# Altium PCB PCB-CAPE-Nucleo_Interface_V1R0.PcbDoc (part 2 of 2)
Units mm, origin at the board's own origin, x right, y up, seen from the top; angles counter-clockwise.
Board outline 100 x 100 mm, 4 copper layers (Top Layer, Layer 1, Layer 2, Bottom Layer), stack 1.494 mm thick; 130 components, 101 nets, 458 pads, 87 vias.
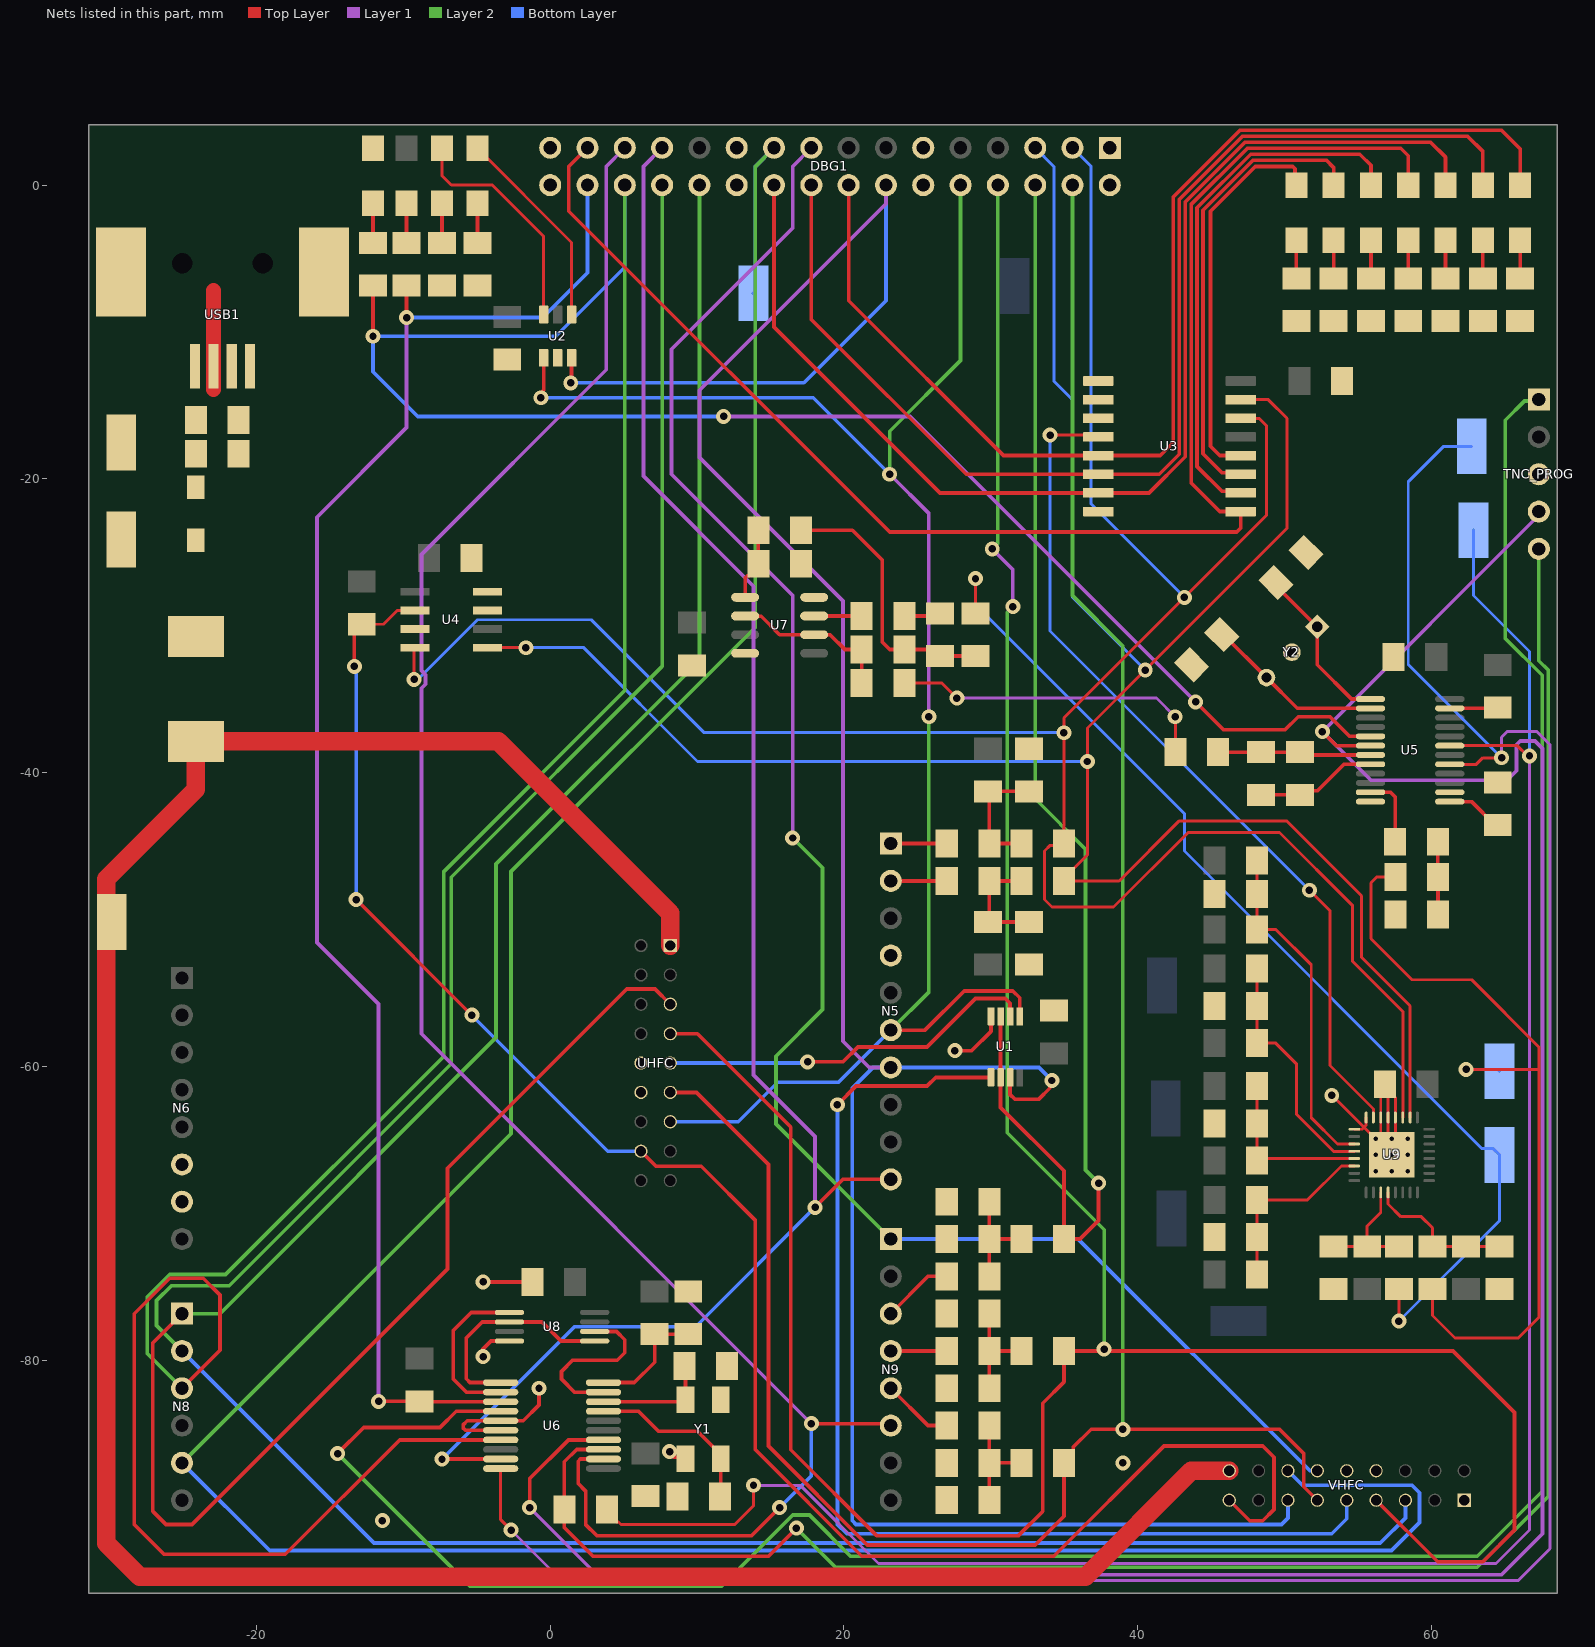
[diagram p4: the nets of this part, all layers, seen from the top]

## Via types
v1: diameter 1.016, hole 0.508, Top Layer to Bottom Layer, tented both sides, 78 vias
v2: diameter 0.61, hole 0.305, Top Layer to Bottom Layer, 9 vias

## Nets (pads, with @x,y where several pads share a name; then routed paths per layer and width w, separated by ;. In a path a pad name is that pad's centre, name@x,y a point inside that pad or via, vN(x,y) a via of type N, cw(c..) or ccw(c..) an arc to the next point about the centre after c; other vN are vias at no path point) (continued)
COM_VHF_TOP/B\O\T\: DBG1.17 N9.1 VHFC.12 | length 122.6
  Layer 1 w0.254: v1(16.51,-44.45) 16.51,-27.94 8.255,-19.685 8.255,-11.176 16.51,-2.921 16.51,1.27 DBG1.17@17.78,2.54
  Layer 2 w0.254: v1(16.51,-44.45) 18.542,-46.482 18.542,-56.134 15.367,-59.309 15.367,-63.932 N9.1@23.19,-71.755
  Bottom Layer w0.254: N9.1@23.19,-71.755 35.941,-71.755 51.721,-87.535 VHFC.12@52.23,-87.535
COM_VHF_TX/R\X\: DBG1.19 N8.5 VHF_TRANS.1 VHFC.14 | length 215.8
  Layer 2 w0.254: N8.5@-25.07,-86.995 -2.667,-64.592 -2.667,-46.736 13.97,-30.099 13.97,1.27 DBG1.19@15.24,2.54
  Bottom Layer w0.254: N8.5@-25.07,-86.995 -19.101,-92.964 57.277,-92.964 59.182,-91.059 59.182,-89.027 58.674,-88.519 51.214,-88.519 VHFC.14@50.23,-87.535 ; VHF_TRANS.1@13.843,-7.366 13.97,-7.239 13.97,1.27 DBG1.19@15.24,2.54
DEBUG_LED_4: DBG1.29 DS4.1 U3.9 | length 102.6
  Top Layer w0.254: DBG1.29@2.54,2.54 1.27,1.27 1.27,-1.778 23.114,-23.622 46.736,-23.622 47.014,-23.344 U3.9@47.014,-22.225 45.593,-22.225 43.637,-20.269 43.637,-1.321 47.473,2.515 57.912,2.515 58.42,2.007 DS4.1@58.42,0
DEBUG_LED_5: DS5.1 U3.10 | length 36.3
  Top Layer w0.254: U3.10@47.014,-20.955 46.909,-20.85 45.742,-20.85 44.044,-19.152 44.044,-1.543 47.695,2.108 55.118,2.108 55.88,1.346 DS5.1@55.88,0
DEBUG_LED_6: DS6.1 U3.11 | length 31.4
  Top Layer w0.254: U3.11@47.014,-19.685 46.909,-19.58 45.742,-19.58 44.45,-18.288 44.45,-1.711 47.863,1.702 52.832,1.702 53.34,1.194 DS6.1@53.34,0
DEBUG_LED_7: DS7.1 U3.12 | length 26.5
  Top Layer w0.254: U3.12@47.014,-18.415 45.593,-18.415 44.958,-17.78 44.958,-1.778 48.006,1.27 50.546,1.27 50.709,1.107 50.709,0.091 DS7.1@50.8,0
GND: C1.2 C2.1 C3.1 C4.1 C5.1 C6.1 C7.2 C8.2 C9.2 C13.2 C16.1 C17.2 C19.1 C20.1 C21.1 C22.1 C23.1 C24.1 C25.1 C28.1 C29.1 C33.2 DBG1.1 DBG1.2 DBG1.11 DBG1.12 DBG1.21 DBG1.22 DBG1.31 DBG1.32 N5.4 N6.6 N6.7 R13.1 R14.1 R15.1 R16.2 R17.2 R18.2 R19.2 R20.2 R21.2 R23.2 R24.2 R25.2 R30.2 R39.1 R46.1 R47.1 R48.1 R49.1 R50.1 R51.1 TNC_PROG.3 TNC_PTT.2 U1.4 U2.2 U3.1 U3.2 U3.3 U3.8 U4.3 U4.7 U4.8 U5.12 U5.14 U6.5 U6.6 U7.4 U7.8 U8.4 U9.1 U9.28 U9.29 U9.30 U9.32 U9.33 UHFC.10 UHFC.12 USB1.4 USB1.5 USB1.6 VHFC.1 VHFC.8 VHFC.10 Y1.2 Y1.4 Y2.2 | length 48.3
  Top Layer w0.203: v1(53.213,-61.976) 53.243,-61.976 55.411,-64.144 ; U9.1@54.747,-64.28 55.275,-64.28 55.411,-64.144 ; U9.32@55.547,-63.48 55.547,-64.008 55.411,-64.144 ; v2(56.197,-64.93) 55.411,-64.144 ; C33.2@56.945,-61.316 57.047,-61.418 C33.2@57.047,-61.618 ; C33.2@56.945,-61.316 C33.2@56.843,-61.214 56.547,-61.51 U9.30@56.547,-63.48 56.547,-65.28 U9.33@57.047,-65.78 ; C33.2@56.945,-61.316 56.945,-61.516 C33.2@57.047,-61.618 ; U9.33@57.047,-65.78 U9.29@57.047,-63.48 C33.2@57.047,-61.618 ; U9.33@57.047,-65.78 v2(57.297,-66.03) 57.547,-65.78 U9.28@57.547,-63.48 57.547,-62.118 C33.2@57.047,-61.618
  Top Layer w0.254: v1(-4.572,-79.756) -4.572,-79.248 -4.023,-78.699 U8.4@-2.773,-78.699 ; v1(-4.572,-74.676) C21.1@-1.196,-74.676 ; U6.6@-3.373,-84.78 -5.771,-84.78 -5.927,-84.624 -5.927,-84.413 -5.644,-84.13 U6.5@-3.373,-84.13 -1.834,-84.13 -0.762,-83.058 v1(-0.762,-81.915) ; v1(8.128,-86.233) 8.128,-86.36 8.382,-86.614 9.119,-86.614 Y1.4@9.214,-86.709 ; v1(27.559,-58.928) 28.702,-58.928 30.013,-57.617 U1.4@30.013,-56.599
  Top Layer w1.016: -22.928,-13.911 USB1.4@-22.928,-12.334 -22.928,-7.18
  other v1: -11.43,-90.932 38.989,-86.995
  other v2: 56.197,-67.13 57.297,-67.13 58.397,-67.13 56.197,-66.03 58.397,-66.03 57.297,-64.93 58.397,-64.93
I2C1_SCL_OUT: DBG1.3 R4.2 U3.14 U4.4 U9.27 | length 167.2
  Top Layer w0.203: v1(-9.271,-33.655) -9.271,-31.571 U4.4@-9.196,-31.496 ; U3.14@47.014,-15.875 48.26,-15.875 48.768,-16.383 48.768,-22.479 v1(43.18,-28.067) 34.98,-36.267 v1(34.98,-37.283) R4.2@34.98,-44.831 34.861,-44.95 34.044,-44.95 33.655,-45.339 33.655,-48.641 34.163,-49.149 38.354,-49.149 43.434,-44.069 49.657,-44.069 54.61,-49.022 54.61,-52.832 58.047,-56.269 U9.27@58.047,-63.48
  Bottom Layer w0.203: v1(-9.271,-33.655) -9.017,-33.655 -4.953,-29.591 2.794,-29.591 10.486,-37.283 v1(34.98,-37.283) ; DBG1.3@35.56,2.54 36.83,1.27 36.83,-21.717 v1(43.18,-28.067)
I2C1_SCL_ST: N5.1 R3.1 | length 3.8
  Top Layer w0.254: N5.1@23.19,-44.831 R3.1@27,-44.831
I2C1_SDA_OUT: DBG1.5 R6.2 U3.15 U4.5 U9.26 | length 164.7
  Top Layer w0.203: U4.5@-4.266,-31.496 v1(-1.651,-31.496) ; U3.15@47.014,-14.605 48.895,-14.605 50.165,-15.875 50.165,-23.368 v1(40.513,-33.02) 36.576,-36.957 v1(36.576,-39.243) 36.576,-45.593 35.646,-46.523 35.628,-46.523 34.98,-47.171 R6.2@34.98,-47.371 38.735,-47.371 42.799,-43.307 50.165,-43.307 55.245,-48.387 55.245,-52.578 58.547,-55.88 U9.26@58.547,-63.48
  Bottom Layer w0.203: v1(-1.651,-31.496) 2.286,-31.496 10.033,-39.243 v1(36.576,-39.243) ; DBG1.5@33.02,2.54 34.29,1.27 34.29,-13.335 35.56,-14.605 35.56,-28.067 v1(40.513,-33.02)
I2C1_SDA_ST: N5.2 R5.1 | length 3.8
  Top Layer w0.254: N5.2@23.19,-47.371 R5.1@27,-47.371
M_OSC1: C24.2 U5.1 Y2.1 | length 11.4
  Top Layer w0.254: C24.2@49.403,-27.051 49.403,-27.262 Y2.1@52.219,-30.077 52.219,-32.661 54.546,-34.989 U5.1@55.847,-34.989
M_OSC2: C25.2 U5.2 Y2.3 | length 12.2
  Top Layer w0.254: C25.2@45.72,-30.607 45.847,-30.607 Y2.3@48.768,-33.528 50.863,-35.623 U5.2@55.847,-35.623
MUX_RST: U3.4 U9.31 | length 58.9
  Top Layer w0.203: v1(34.036,-17.018) 37.187,-17.018 U3.4@37.314,-17.145 ; v1(51.689,-48.006) 53.086,-49.403 53.086,-59.944 56.047,-62.905 U9.31@56.047,-63.48
  Bottom Layer w0.203: v1(34.036,-17.018) 34.036,-30.353 v1(51.689,-48.006)
MUX_X0: C26.1 R40.1 R46.2 U9.3 | length 23.5
  Top Layer w0.203: R40.1@48.133,-45.974 R46.2@48.133,-48.26 C26.1@48.133,-50.673 49.403,-50.673 51.816,-53.086 51.816,-63.5 53.596,-65.28 U9.3@54.747,-65.28
MUX_X1: C27.1 R41.1 R47.2 U9.4 | length 16.8
  Top Layer w0.203: C27.1@48.133,-53.34 R47.2@48.133,-55.88 R41.1@48.133,-58.42 49.403,-58.42 50.8,-59.817 50.8,-63.246 53.334,-65.78 U9.4@54.747,-65.78
MUX_X2: C30.1 R42.1 R48.2 U9.5 | length 11.8
  Top Layer w0.203: R42.1@48.133,-61.341 R48.2@48.133,-63.881 C30.1@48.133,-66.421 48.274,-66.28 U9.5@54.747,-66.28
MUX_X3: C31.1 R43.1 R49.2 U9.6 | length 12.7
  Top Layer w0.203: C31.1@48.133,-74.168 R49.2@48.133,-71.628 R43.1@48.133,-69.088 51.562,-69.088 53.87,-66.78 U9.6@54.747,-66.78
MUX_Y2: C34.1 R45.1 R51.2 U9.11 | length 8.5
  Top Layer w0.203: R51.2@53.34,-72.263 R45.1@55.626,-72.263 ; U9.11@56.547,-68.58 56.547,-69.945 55.626,-70.866 R45.1@55.626,-72.263 ; C34.1@57.785,-72.263 R45.1@55.626,-72.263
MUX_Y3: C32.1 R44.1 R50.2 U9.12 | length 10.3
  Top Layer w0.203: U9.12@57.047,-68.58 57.047,-69.366 57.912,-70.231 59.309,-70.231 60.071,-70.993 C32.1@60.071,-72.263 R44.1@62.357,-72.263 R50.2@64.643,-72.263
NetC2_2: C2.2 R2.1 R3.2 R4.1 | length 8.6
  Top Layer w0.254: R4.1@32.08,-44.831 R3.2@29.9,-44.831 29.9,-41.381 R2.1@29.794,-41.275 C2.2@32.588,-41.275
NetC3_2: C3.2 R1.1 R5.2 R6.1 | length 7.8
  Top Layer w0.254: R6.1@32.08,-47.371 R5.2@29.9,-47.371 29.9,-50.059 R1.1@29.794,-50.165 C3.2@32.588,-50.165
NetC4_2: C4.2 R7.2 R8.1 R13.2 | length 7.3
  Top Layer w0.254: R13.2@29.9,-89.535 C4.2@29.9,-86.995 ; R7.2@29.9,-84.455 C4.2@29.9,-86.995 ; R8.1@32.08,-86.995 C4.2@29.9,-86.995
NetC5_2: C5.2 R9.2 R10.1 R14.2 | length 7.3
  Top Layer w0.254: C5.2@29.9,-81.915 R9.2@29.9,-79.375 ; R14.2@29.9,-76.835 R9.2@29.9,-79.375 ; R10.1@32.08,-79.375 R9.2@29.9,-79.375
NetC6_2: C6.2 R11.2 R12.1 R15.2 | length 7.3
  Top Layer w0.254: R11.2@29.9,-74.295 C6.2@29.9,-71.755 ; R15.2@29.9,-69.215 C6.2@29.9,-71.755 ; R12.1@32.08,-71.755 C6.2@29.9,-71.755
NetC10_1: C10.1 R32.2 | length 21.8
  Top Layer w0.203: C10.1@24.109,-33.909 26.67,-33.909 v1(27.686,-34.925) ; v1(42.545,-36.195) 42.566,-36.216 R32.2@42.566,-38.608
  Layer 1 w0.203: v1(27.686,-34.925) 41.275,-34.925 v1(42.545,-36.195)
NetC10_2: C10.2 C11.1 U7.2 U7.6 | length 11.2
  Top Layer w0.254: U7.6@13.271,-29.337 13.284,-29.35 14.364,-29.35 15.621,-30.607 U7.2@17.971,-30.607 17.984,-30.62 19.063,-30.62 20.066,-31.623 C11.1@21.209,-31.623 C10.2@21.209,-33.909
NetC11_2: C11.2 C14.1 R35.1 R38.2 | length 18.7
  Top Layer w0.254: R38.2@17.071,-23.495 20.574,-23.495 22.606,-25.527 22.606,-31.115 23.114,-31.623 C11.2@24.109,-31.623 26.109,-31.623 R35.1@26.543,-32.057 C14.1@28.956,-32.057
NetC12_1: C12.1 R32.1 R33.1 U5.7 | length 10.7
  Top Layer w0.254: R32.1@45.466,-38.608 R33.1@48.387,-38.608 C12.1@50.8,-38.608 ; C12.1@51.054,-38.608 C12.1@50.8,-38.608 ; U5.7@55.847,-38.798 50.99,-38.798 C12.1@50.8,-38.608
NetC12_2: C12.2 R33.2 U5.8 | length 8.3
  Top Layer w0.254: R33.2@48.387,-41.508 C12.2@51.054,-41.508 51.326,-41.236 52.236,-41.236 54.038,-39.433 U5.8@55.847,-39.433
NetC13_1: C13.1 U5.13 | length 3.9
  Top Layer w0.254: U5.13@61.247,-41.974 62.729,-41.974 64.316,-43.561 C13.1@64.516,-43.561
NetC15_1: C15.1 R37.1 R39.2 | length 5
  Top Layer w0.254: R37.1@60.431,-44.704 60.431,-47.096 C15.1@60.452,-47.117 R39.2@60.452,-49.657
NetC16_2: C16.2 R38.1 U7.5 | length 5.6
  Top Layer w0.254: U7.5@13.803,-27.907 13.643,-28.067 U7.5@13.271,-28.067 13.271,-26.753 13.42,-26.604 13.548,-26.604 14.171,-25.981 C16.2@14.171,-25.781 R38.1@14.171,-23.495
NetDS4_2: DS4.2 R25.1 | length 2.6
  Top Layer w0.254: R25.1@58.42,-6.35 DS4.2@58.42,-3.75
NetDS5_2: DS5.2 R17.1 | length 2.6
  Top Layer w0.254: R17.1@55.88,-6.35 DS5.2@55.88,-3.75
NetDS6_2: DS6.2 R20.1 | length 2.6
  Top Layer w0.254: R20.1@53.34,-6.35 DS6.2@53.34,-3.75
NetDS7_2: DS7.2 R24.1 | length 2.6
  Top Layer w0.254: R24.1@50.8,-6.35 DS7.2@50.8,-3.75
NetR16_1: R16.1 UACT.2 | length 2.6
  Top Layer w0.254: R16.1@66.04,-6.35 UACT.2@66.04,-3.75
NetR18_1: R18.1 UHF.2 | length 2.7
  Top Layer w0.254: R18.1@-7.366,-3.937 UHF.2@-7.366,-1.24
NetR19_1: R19.1 VACT.2 | length 2.6
  Top Layer w0.254: R19.1@63.5,-6.35 VACT.2@63.5,-3.75
NetR21_1: R21.1 VHF.2 | length 2.7
  Top Layer w0.254: R21.1@-4.953,-3.937 VHF.2@-4.953,-1.24
NetR23_1: R23.1 TACT.2 | length 2.6
  Top Layer w0.254: R23.1@60.96,-6.35 TACT.2@60.96,-3.75
NetR26_1: R26.1 U5.23 | length 3.3
  Top Layer w0.254: U5.23@61.247,-35.623 64.453,-35.623 R26.1@64.516,-35.56
NetR27_2: R27.2 R30.1 U6.20 | length 8.3
  Top Layer w0.254: U6.20@3.627,-81.53 5.719,-81.53 7.112,-80.137 R27.2@7.112,-78.232 R30.1@9.398,-78.232
NetR28_2: R28.2 TNC_PTT.1 | length 2.7
  Top Layer w0.254: R28.2@-12.065,-3.937 TNC_PTT.1@-12.065,-1.24
NetR34_1: R34.1 TNC_EGY.2 | length 2.7
  Top Layer w0.254: R34.1@-9.779,-3.937 TNC_EGY.2@-9.779,-1.24
NetR35_2: R35.2 R36.2 | length 2.5
  Top Layer w0.254: R36.2@24.109,-29.337 26.363,-29.337 R35.2@26.543,-29.157
NetR36_1: R36.1 U7.3 | length 3.2
  Top Layer w0.254: U7.3@17.971,-29.337 R36.1@21.209,-29.337
NetR37_2: R37.2 U5.11 | length 4.9
  Top Layer w0.254: U5.11@55.847,-41.338 57.213,-41.338 57.531,-41.656 R37.2@57.531,-44.704
NetU2_4: U2.4 VHF.1 | length 14
  Top Layer w0.203: VHF.1@-4.953,2.51 1.458,-3.901 U2.4@1.458,-8.812
NetU2_6: U2.6 UHF.1 | length 15.8
  Top Layer w0.203: UHF.1@-7.366,2.51 -7.366,0.635 -6.731,0 -3.937,0 -0.442,-3.495 U2.6@-0.442,-8.812
OneWire: R22.2 U4.2 UHFC.16 VHFC.17 | length 124.1
  Top Layer w0.203: R22.2@-12.827,-29.898 -11.356,-29.898 -10.414,-28.956 U4.2@-9.196,-28.956
  Top Layer w0.254: v1(-13.335,-32.766) -13.335,-30.406 R22.2@-12.827,-29.898 ; v1(-13.208,-48.641) v1(-5.334,-56.515) ; UHFC.16@6.18,-65.772 7.21,-66.802 10.287,-66.802 13.97,-70.485 13.97,-86.106 21.209,-93.345 34.29,-93.345 41.783,-85.852 48.514,-85.852 49.276,-86.614 49.276,-90.17 48.514,-90.932 47.627,-90.932 VHFC.17@46.23,-89.535
  Bottom Layer w0.254: v1(-13.335,-32.766) -13.208,-32.893 v1(-13.208,-48.641) ; v1(-5.334,-56.515) 3.923,-65.772 UHFC.16@6.18,-65.772
PA_PWR: D1.1 PA_Power.1 UHFC.1 VHFC.18 | length 176.8
  Top Layer w1.27: UHFC.1@8.18,-51.772 8.18,-49.582 -3.531,-37.871 D1.1@-24.13,-37.871 -24.13,-41.148 -30.226,-47.244 -30.226,-92.456 -27.94,-94.742 36.449,-94.742 43.656,-87.535 VHFC.18@46.23,-87.535
SPI1_MISO_OUT: DBG1.6 R12.2 U1.3 U1.6 | length 92.1
  Top Layer w0.254: U1.3@30.663,-56.599 U1.6@30.663,-60.749 30.663,-62.794 34.98,-67.111 R12.2@34.98,-71.755 36.068,-71.755 37.338,-70.485 v1(37.338,-67.945)
  Layer 2 w0.254: DBG1.6@33.02,0 33.02,-41.783 36.449,-45.212 36.449,-67.056 v1(37.338,-67.945)
SPI1_MISO_ST: N9.3 R11.1 | length 4.9
  Top Layer w0.254: N9.3@23.19,-76.835 25.73,-74.295 R11.1@27,-74.295
SPI1_MISO_UHF: U1.2 UHFC.9 | length 26
  Top Layer w0.254: v1(17.526,-59.69) 19.939,-59.69 20.955,-58.674 25.654,-58.674 28.956,-55.372 30.988,-55.372 31.313,-55.697 U1.2@31.313,-56.599
  Bottom Layer w0.254: UHFC.9@8.18,-59.772 17.444,-59.772 v1(17.526,-59.69)
SPI1_MISO_VHF: U1.5 VHFC.9 | length 76.4
  Top Layer w0.254: v1(19.558,-62.611) 20.828,-61.341 25.654,-61.341 26.246,-60.749 U1.5@30.013,-60.749
  Bottom Layer w0.254: v1(19.558,-62.611) 19.558,-91.186 20.192,-91.82 53.214,-91.82 54.23,-90.804 VHFC.9@54.23,-89.535
SPI1_MOSI_OUT: DBG1.8 R10.2 UHFC.7 VHFC.7 | length 200.1
  Top Layer w0.254: UHFC.7@8.18,-57.772 10.02,-57.772 16.383,-64.135 16.383,-86.106 22.225,-91.948 31.877,-91.948 33.528,-90.297 33.528,-82.931 34.98,-81.479 R10.2@34.98,-79.375 v1@37.719,-79.375 ; v1(37.719,-79.248) v1@37.719,-79.375 ; VHFC.7@56.23,-89.535 60.421,-93.726 63.5,-93.726 65.659,-91.567 65.659,-83.566 61.468,-79.375 v1@37.719,-79.375
  Layer 1 w0.254: v1(30.099,-24.765) 31.496,-26.162 v1(31.496,-28.702)
  Layer 2 w0.254: v1(30.099,-24.765) 30.48,-24.384 DBG1.8@30.48,0 ; v1(31.496,-28.702) 31.115,-29.083 31.115,-64.516 37.719,-71.12 v1(37.719,-79.248)
SPI1_MOSI_ST: N9.4 R9.1 | length 3.8
  Top Layer w0.254: N9.4@23.19,-79.375 R9.1@27,-79.375
SPI1_SCK_OUT: DBG1.4 R8.2 UHFC.11 VHFC.11 | length 163.1
  Top Layer w0.254: UHFC.11@8.18,-61.772 9.956,-61.772 14.859,-66.675 14.859,-85.852 21.59,-92.583 33.02,-92.583 34.98,-90.623 R8.2@34.98,-86.995 34.98,-86.795 35.603,-86.172 35.603,-85.936 36.83,-84.709 v1(38.989,-84.709) 49.657,-84.709 51.308,-86.36 51.308,-88.613 VHFC.11@52.23,-89.535
  Layer 2 w0.254: DBG1.4@35.56,0 35.56,-27.94 38.989,-31.369 v1(38.989,-84.709)
SPI1_SCK_ST: N9.5 R7.1 | length 4.9
  Top Layer w0.254: N9.5@23.19,-81.915 25.73,-84.455 R7.1@27,-84.455
TNC_ACTIVE: DBG1.20 TACT.1 U3.7 | length 82.4
  Top Layer w0.254: DBG1.20@15.24,0 15.24,-9.652 26.543,-20.955 U3.7@37.314,-20.955 40.767,-20.955 43.231,-18.491 43.231,-1.152 47.304,2.921 59.944,2.921 60.96,1.905 TACT.1@60.96,0
TNC_CS: U6.2 U8.1 | length 11.2
  Top Layer w0.254: U6.2@-3.373,-82.18 -5.704,-82.18 -6.604,-81.28 -6.604,-77.978 -5.375,-76.749 U8.1@-2.773,-76.749
TNC_ENERGY: DBG1.30 R29.2 R34.2 U6.3 | length 108.1
  Top Layer w0.254: v1(-11.684,-82.804) R29.2@-8.89,-82.804 -8.864,-82.83 U6.3@-3.373,-82.83 ; v1(-9.779,-9.017) R34.2@-9.779,-6.837
  Layer 1 w0.254: v1(-11.684,-82.804) -11.684,-55.753 -15.875,-51.562 -15.875,-22.606 -9.779,-16.51 v1(-9.779,-9.017)
  Bottom Layer w0.254: v1(-9.779,-9.017) -0.508,-9.017 2.54,-5.969 DBG1.30@2.54,0
TNC_M\C\L\R\: TNC_PROG.1 U6.4 | length 179.9
  Top Layer w0.254: v1(-14.478,-86.36) -12.7,-84.582 -7.493,-84.582 -6.391,-83.48 U6.4@-3.373,-83.48
  Layer 2 w0.254: v1(-14.478,-86.36) -5.461,-95.377 11.684,-95.377 16.51,-90.551 17.653,-90.551 20.447,-93.345 63.119,-93.345 67.539,-88.925 67.539,-33.376 65.024,-30.861 65.024,-16.002 66.328,-14.698 67.217,-14.698 TNC_PROG.1@67.31,-14.605
TNC_MRX: R31.2 TNC_FSK_RX.1 U5.19 | length 143.8
  Top Layer w0.203: R31.2@3.863,-90.17 3.863,-90.37 4.511,-91.018 4.658,-91.018 4.826,-91.186 12.573,-91.186 13.843,-89.916 v1(13.843,-88.519) ; U5.19@61.247,-38.163 65.849,-38.163 66.548,-38.862 v1(66.675,-38.862)
  Layer 1 w0.203: v1(13.843,-88.519) 17.018,-88.519 22.352,-93.853 64.389,-93.853 66.675,-91.567 v1(66.675,-38.862)
  Bottom Layer w0.203: TNC_FSK_RX.1@62.865,-23.495 62.865,-27.94 66.675,-31.75 v1(66.675,-38.862)
TNC_MTX: TNC_FSK_TX.1 U5.17 U6.10 | length 167.9
  Top Layer w0.203: U6.10@-3.373,-87.38 -3.373,-90.861 v1(-2.667,-91.567) ; U5.17@61.247,-39.433 63.055,-39.433 63.5,-38.989 v1(64.77,-38.989)
  Layer 1 w0.203: v1(-2.667,-91.567) 0.762,-94.996 65.913,-94.996 68.072,-92.837 68.072,-38.1 67.183,-37.211 65.151,-37.211 64.77,-37.592 v1(64.77,-38.989)
  Bottom Layer w0.203: TNC_FSK_TX.1@62.738,-17.78 60.833,-17.78 58.42,-20.193 58.42,-32.639 v1(64.77,-38.989)
TNC_OSC1: C22.2 U6.17 Y1.1 | length 12.1
  Top Layer w0.254: U6.17@3.627,-83.48 6.01,-83.48 7.366,-84.836 10.033,-84.836 11.614,-86.417 Y1.1@11.614,-86.709 11.614,-89.224 C22.2@11.557,-89.281
TNC_OSC2: C23.2 U6.18 Y1.3 | length 8
  Top Layer w0.254: U6.18@3.627,-82.83 9.093,-82.83 Y1.3@9.214,-82.709 9.214,-80.461 C23.2@9.144,-80.391
TNC_PGC: R31.1 TNC_PROG.5 U6.13 | length 143.9
  Top Layer w0.254: U6.13@3.627,-86.08 1.804,-86.08 0.963,-86.921 R31.1@0.963,-90.17 0.963,-91.387 2.921,-93.345 14.859,-93.345 v1(16.764,-91.44)
  Layer 2 w0.254: v1(16.764,-91.44) 19.431,-94.107 63.119,-94.107 67.945,-89.281 67.945,-33.02 67.31,-32.385 TNC_PROG.5@67.31,-24.765
TNC_PGD: TNC_PROG.4 U5.6 U6.14 | length 177
  Top Layer w0.254: v1(-1.397,-90.043) -1.397,-88.064 1.237,-85.43 U6.14@3.627,-85.43 ; v1(52.578,-37.211) 53.53,-38.163 U5.6@55.847,-38.163
  Layer 1 w0.254: v1(-1.397,-90.043) 3.175,-94.615 64.77,-94.615 67.564,-91.821 67.564,-38.354 67.056,-37.846 66.04,-37.846 65.786,-38.1 65.786,-39.878 65.151,-40.513 55.88,-40.513 v1(52.578,-37.211) 67.31,-22.479 TNC_PROG.4@67.31,-22.225
TNC_PTT_IRQ: DBG1.28 N8.3 R28.1 U5.5 U6.7 | length 266.2
  Top Layer w0.254: N8.3@-25.07,-81.915 -22.479,-79.324 -22.479,-75.565 -23.622,-74.422 -25.908,-74.422 -28.321,-76.835 -28.321,-91.186 -26.289,-93.218 -18.034,-93.218 -10.246,-85.43 U6.7@-3.373,-85.43 ; v1(-12.065,-10.287) R28.1@-12.065,-6.837 ; v1(43.942,-35.179) 45.847,-37.084 50.038,-37.084 50.927,-36.195 53.086,-36.195 54.419,-37.529 U5.5@55.847,-37.529
  Layer 1 w0.254: v1(11.811,-15.748) 24.511,-15.748 v1(43.942,-35.179)
  Layer 2 w0.254: N8.3@-25.07,-81.915 -27.432,-79.553 -27.432,-75.692 -25.908,-74.168 -22.098,-74.168 -7.239,-59.309 -7.239,-46.736 5.08,-34.417 DBG1.28@5.08,0
  Bottom Layer w0.254: DBG1.28@5.08,0 5.08,-5.588 0.381,-10.287 v1(-12.065,-10.287) -12.065,-12.7 -9.017,-15.748 v1(11.811,-15.748)
TNC_SCK: U6.19 U8.6 | length 11.8
  Top Layer w0.254: U8.6@3.027,-78.049 4.516,-78.049 5.08,-78.613 5.08,-79.502 4.572,-80.01 1.524,-80.01 0.762,-80.772 0.762,-81.28 1.662,-82.18 U6.19@3.627,-82.18
TNC_SIG_IN: C14.2 C34.2 TNCo.1 | length 73.2
  Top Layer w0.203: C14.2@28.956,-29.157 v1(28.956,-26.797) ; v1(57.785,-77.343) C34.2@57.785,-75.163
  Bottom Layer w0.203: v1(28.956,-26.797) 28.956,-28.575 43.18,-42.799 43.18,-45.339 63.442,-65.601 64.204,-65.601 TNCo.1@64.643,-66.04 64.643,-70.485 v1(57.785,-77.343)
TNC_SIG_OUT: C15.2 C32.2 TNCi.1 | length 56.1
  Top Layer w0.203: C15.2@57.552,-47.117 56.261,-47.117 55.88,-47.498 55.88,-51.308 58.674,-54.102 62.738,-54.102 67.31,-58.674 67.31,-60.198 ; C32.2@60.071,-75.163 60.071,-76.962 61.595,-78.486 65.913,-78.486 67.31,-77.089 67.31,-60.198 ; v1(62.357,-60.198) 67.31,-60.198
  Bottom Layer w0.203: v1(62.357,-60.198) 64.516,-60.198 TNCi.1@64.643,-60.325
TNC_SPI: U6.1 U8.2 U8.5 | length 15
  Top Layer w0.254: U6.1@-3.373,-81.53 -5.454,-81.53 -5.715,-81.269 -5.715,-78.486 -4.628,-77.399 U8.2@-2.773,-77.399 -0.564,-77.399 0.736,-78.699 U8.5@3.027,-78.699
U1_ST_RX-TNC_TX: DBG1.27 N9.6 U6.12 | length 136.5
  Top Layer w0.254: U6.12@3.627,-86.73 2.054,-86.73 1.905,-86.879 1.905,-88.392 2.413,-88.9 2.413,-91.186 3.175,-91.948 13.716,-91.948 v1(15.621,-90.043) ; v1(17.78,-84.328) 23.063,-84.328 N9.6@23.19,-84.455
  Layer 1 w0.254: DBG1.27@5.08,2.54 3.81,1.27 3.81,-12.573 -8.763,-25.146 -8.763,-33.049 -8.484,-33.329 -8.484,-33.981 -8.763,-34.261 -8.763,-57.785 v1(17.78,-84.328)
  Bottom Layer w0.254: v1(15.621,-90.043) 17.78,-87.884 v1(17.78,-84.328)
U1_ST_TX-TNC_RX: DBG1.25 N5.10 U6.9 | length 119.9
  Top Layer w0.254: v1(-7.366,-86.741) -7.355,-86.73 U6.9@-3.373,-86.73 ; v1(18.034,-69.596) 19.939,-67.691 N5.10@23.19,-67.691
  Layer 1 w0.254: DBG1.25@7.62,2.54 6.35,1.27 6.35,-19.812 13.843,-27.305 13.843,-60.579 18.034,-64.77 v1(18.034,-69.596)
  Bottom Layer w0.254: v1(-7.366,-86.741) 1.651,-77.724 9.906,-77.724 v1(18.034,-69.596)
UHF_ACTIVE: DBG1.16 U3.5 UACT.1 | length 79.9
  Top Layer w0.254: DBG1.16@20.32,0 20.32,-7.874 30.861,-18.415 U3.5@37.314,-18.415 41.529,-18.415 42.418,-17.526 42.418,-0.816 46.968,3.734 64.77,3.734 66.04,2.464 UACT.1@66.04,0
UHF_CS: DBG1.10 N5.6 U1.1 U2.1 UHFC.13 | length 119.3
  Top Layer w0.254: v1(-0.635,-14.478) -0.489,-14.332 -0.489,-13.995 -0.442,-13.948 U2.1@-0.442,-11.762 ; N5.6@23.19,-57.531 25.527,-57.531 28.194,-54.864 31.496,-54.864 31.963,-55.331 U1.1@31.963,-56.599
  Layer 1 w0.254: v1(23.114,-19.685) 25.781,-22.352 v1(25.781,-36.195)
  Layer 2 w0.254: v1(23.114,-19.685) 23.114,-16.764 27.94,-11.938 DBG1.10@27.94,0 ; N5.6@23.19,-57.531 25.781,-54.94 v1(25.781,-36.195)
  Bottom Layer w0.254: v1(-0.635,-14.478) 17.907,-14.478 v1(23.114,-19.685) ; UHFC.13@8.18,-63.772 12.809,-63.772 15.494,-61.087 19.634,-61.087 N5.6@23.19,-57.531
UHF_IRQ: DBG1.24 N8.1 UHFC.5 | length 162.4
  Top Layer w0.254: N8.1@-25.07,-76.835 -27.051,-78.816 -27.051,-90.297 -26.162,-91.186 -24.384,-91.186 -6.985,-73.787 -6.985,-66.929 5.207,-54.737 7.145,-54.737 UHFC.5@8.18,-55.772
  Layer 2 w0.254: N8.1@-25.07,-76.835 -22.479,-76.835 -3.683,-58.039 -3.683,-46.228 10.16,-32.385 DBG1.24@10.16,0
USB_D_N: USB1.2
USB_D_P: USB1.3
USB_Vbus: C28.2 C29.2 FB1.1 USB1.1 Vbus.1 | length 0.1
  Top Layer w0.711: C29.2@-24.178,-15.954 C29.2@-24.13,-16.002
Vbus_Filtered: D1.2 FB1.2 Vbus_f.1
VHF_ACTIVE: DBG1.18 U3.6 VACT.1 | length 81.6
  Top Layer w0.254: DBG1.18@17.78,0 17.78,-9.144 28.321,-19.685 U3.6@37.314,-19.685 41.462,-19.685 42.824,-18.323 42.824,-0.984 47.136,3.328 62.458,3.328 63.5,2.286 VACT.1@63.5,0
VHF_CS: DBG1.14 N5.7 U1.7 U2.3 VHFC.13 | length 185
  Top Layer w0.254: v1(1.397,-13.462) 1.458,-13.401 U2.3@1.458,-11.762 ; U1.7@31.313,-60.749 31.313,-61.92 31.623,-62.23 33.274,-62.23 34.017,-61.487 34.017,-61.106 v1(34.163,-60.96)
  Layer 1 w0.254: DBG1.14@22.86,0 22.86,-1.27 10.16,-13.97 10.16,-18.542 19.939,-28.321 19.939,-58.293 21.717,-60.071 N5.7@23.19,-60.071
  Bottom Layer w0.254: v1(1.397,-13.462) 17.272,-13.462 22.86,-7.874 DBG1.14@22.86,0 ; v1(34.163,-60.96) 33.274,-60.071 N5.7@23.19,-60.071 21.971,-60.071 20.574,-61.468 20.574,-90.932 20.828,-91.186 49.784,-91.186 50.23,-90.74 VHFC.13@50.23,-89.535
VHF_IRQ: DBG1.26 N8.2 VHFC.5 | length 187.3
  Layer 2 w0.254: N8.2@-25.07,-79.375 -26.797,-77.648 -26.797,-75.946 -25.781,-74.93 -21.844,-74.93 -6.731,-59.817 -6.731,-47.117 7.62,-32.766 DBG1.26@7.62,0
  Bottom Layer w0.254: N8.2@-25.07,-79.375 -11.989,-92.456 56.515,-92.456 58.23,-90.741 VHFC.5@58.23,-89.535
pads on no net: N5.5 N6.1 N6.2 N6.3 N6.8 N9.7 N9.8 U3.13 U4.6 U5.3 U5.4 U5.9 U5.10 U5.15 U5.16 U5.20 U5.21 U5.22 U6.8 U6.11 U7.1 U8.3 U9.2 U9.7 U9.8 U9.9 U9.10 U9.13 U9.14 U9.15 U9.16 U9.17 U9.18 U9.19 U9.20 U9.21 U9.22 U9.23 USB1.MH

## Polygon pours and split planes (outlines as drawn)
GND on Top Layer "GND_L01_P004" (solid, remove dead copper, pour order 4): -31.42,-95.885 68.58,-95.885 68.58,4.115 -31.42,4.115
Vbus_Filtered on Top Layer "VBUS_FILTERED_L01_P002" (solid, remove dead copper, pour order 2): -30.988,-22.352 -30.988,-34.29 -20.32,-34.29 -20.32,-22.352
USB_Vbus on Top Layer "USB_VBUS_L01_P000" (solid, remove dead copper, pour order 0): -23.622,-10.414 -30.988,-10.414 -30.988,-21.336 -22.86,-21.336 -22.86,-14.732 -23.622,-14.732
GND on Bottom Layer "GND_L04_P006" (solid, remove dead copper, pour order 6): -31.42,-95.885 68.58,-95.885 68.58,4.115 -31.42,4.115
3V3 on Layer 1 "3V3_L02_P008" (solid, remove dead copper, pour order 8): -31.42,-95.885 68.58,-95.885 68.58,4.115 -31.42,4.115
3V3 on Layer 2 "3V3_L03_P010" (solid, remove dead copper, pour order 10): -31.42,-95.885 68.58,-95.885 68.58,4.115 -31.42,4.115

## Other copper
Bottom Layer:
  text "NJE '19" at 67.056,0.635 h3.81

## Silkscreen, mask and mechanical layers (free items; w line width, h text height)
Top Overlay:
  text "V" at 64.516,4.191 h2 r180
  text "U" at 67.183,4.191 h2 r180
  text "7" at 51.562,4.064 h2 r180
  text "5" at 56.896,4.064 h2 r180
  text "4" at 59.436,4.064 h2 r180
  text "T" at 61.976,4.064 h2 r180
  text "6" at 54.356,3.937 h2 r180
  text "M / 3 / 0 / D / C" at 63.754,-27.813 h1.75
  text "CAPE-3 AX5043 Radio Board" at 3.556,-69.342 h1.52 r90
Bottom Overlay:
  text "Designed for the / Cajun Advanced Picosatellite Experiment / at UL Lafayette" at 42.799,-20.828 h1.52
  text "STM32Nucleo-L476" at 12.446,-46.101 h1.52
  text "SCH-CAPE-Nucleo_Interface_V1R0.SchDoc / '.Pcb_File_Name_No_Path'" at 46.101,-84.582 h1.52 r270
Bottom Solder:
  drawing of 1454 lines, arcs and shapes, not listed
Mechanical 1:
  the board outline again, w0.013
Mechanical 13:
  lines w0.013: -35.945,-94.66 34.055,-94.66 34.055,-11.66 -35.945,-11.66 -35.945,-94.66 ; -20.032,-121.812 -20.032,-121.537 -20.032,-21.812 79.968,-21.812 79.968,-121.812 -20.032,-121.812
Mechanical 20 (Mech20):
  lines w0.013: -99.365,-158.115 180.035,-158.115 180.035,57.785 -99.365,57.785 -99.365,-158.115
  lines w0.127: -51.574,-156.997 179.566,-156.997 ; 49.149,-149.377 179.566,-149.377 ; 49.149,-134.137 103.366,-134.137 ; 49.276,-141.757 179.566,-141.757 ; 65.266,-156.997 -51.625,-156.997 -51.625,-126.517 65.266,-126.517 ; 103.366,-156.997 103.366,-141.757 103.366,-126.517 ; 156.706,-156.997 156.706,-141.757 ; 103.366,-126.517 179.566,-126.517 179.566,-156.997 ; 103.366,-126.517 49.149,-126.517 49.149,-156.997 179.566,-156.997
  lines w0.254: 13.831,-156.972 13.831,-126.517
  text "TITLE:" at 104.636,-129.057 h1.14
  text "ENGINEER:" at 51.423,-129.184 h1.14
  text "Nolan Edwards / LA EI.0033436" at 60.325,-132.842 h1.78
  text "CAPE-3 AX5043 Nucleo Interface Board V1R0" at 106.033,-134.29 h1.78
  text "PCB DESIGNER:" at 51.169,-136.296 h1.14
  text "Nolan Edwards / LA EI.0033436" at 64.389,-140.589 h1.78
  text "DATE:" at 50.915,-144.043 h1.14
  text "Version:" at 157.976,-144.297 h1.14
  text "Pelican Engineering / 120 Banks Avenue / Lafayette, LA 70506 / LA EF.0006205 / Customer: Cajun Advanced Picosatellite Experiment" at -50.8,-144.509 h1.78
  text "1" at 162.167,-146.431 h1.78
  text "09/07/2019" at 52.185,-147.091 h1.78
  text "Document Number:" at 49.899,-151.917 h1.14
  text "Revision:" at 157.976,-151.917 h1.14
  text "0" at 167.12,-154.432 h1.78
  text ".PCB_FILE_NAME_NO_PATH" at 51.169,-154.965 h1.78

## Text inside footprints (layer, text, board x,y; h text height)
DBG1: Top Overlay "2" at 40.64,0.508 h1.27 r180; Top Overlay "1" at 40.132,3.048 h1.27 r180; Top Overlay "31" at -1.524,3.048 h1.27 r180; Top Overlay "32" at -1.524,0.508 h1.27 r180